# Altium PCB SLAVE_HW.PcbDoc (part 2 of 2)
Units mm, origin at the board's own origin, x right, y up, seen from the top; angles counter-clockwise.
Board outline 140 x 52 mm, 2 copper layers (Top Layer, Bottom Layer); 186 components, 129 nets, 475 pads, 0 vias.
Unrouted connection lines stored in the file: 330.
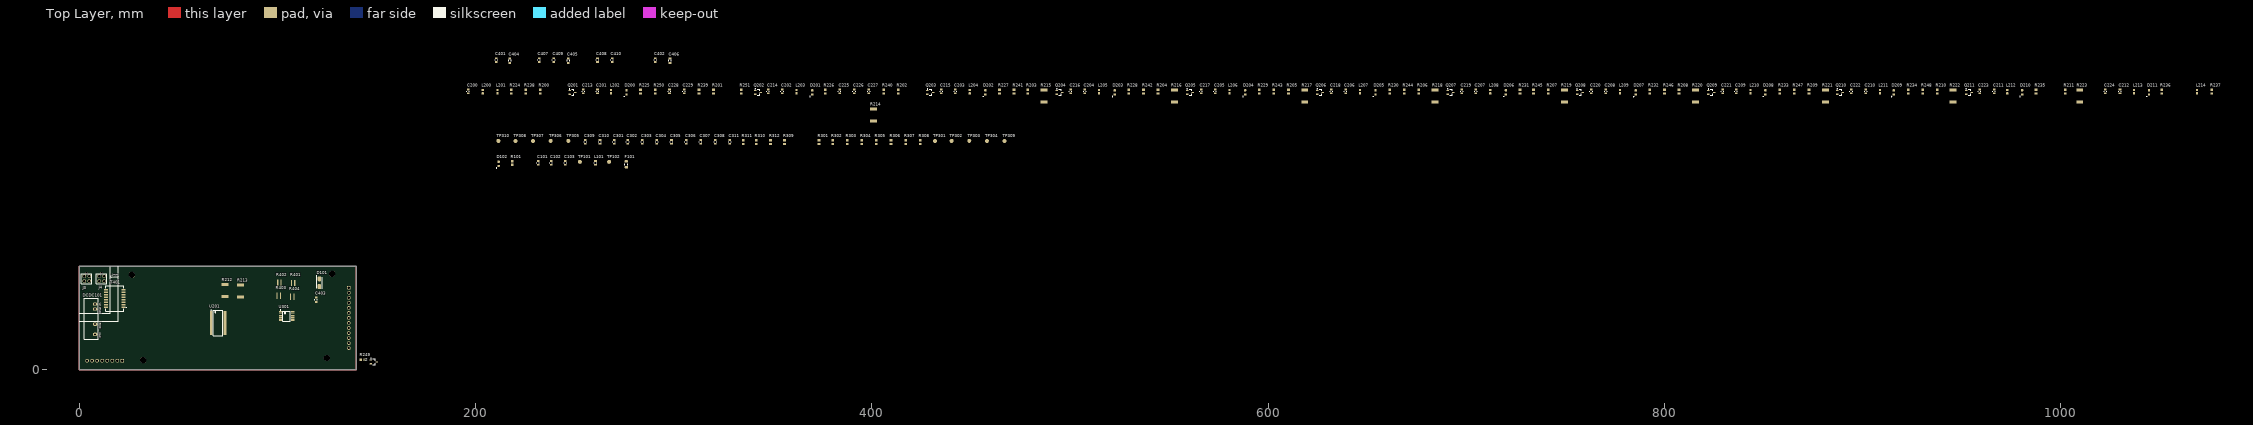
[diagram p0: Top Layer view]

## Part data (continued)
R301 R302 R303 R304 R305 R306 R307 R308 R309 R310 R311: library part R10k-0805FTK, "BOURNS         CR0805-JW-103ELF            Surface Mount Chip Resistor, Thick Film, CR Series, 10 kohm, 125 mW,  5%, 150 V", Case Code (Imperial)=0805, Case Code (Metric)=2012, Manufacturer 1=Bourns, Max Operating Temperature=155°C, Max Power Dissipation=125mW, Min Operating Temperature=-55°C, Package Quantity=1, Resistance=10kR, Resistance Tolerance=5%, Resistor Type="Thick Film", Temperature Coefficient=200ppm/°C, Voltage Rating=150V, Voltage Rating (DC)=100V, .Creator=DR, Case/Package=0805, Category="Chip SMD Resistors", ComponentLink1Description=https://datasheet.ciiva.com/11821/0900766b80fcdb72-11821135.pdf?src-supplier=RSComponents, ComponentLink1URL=https://datasheet.ciiva.com/11821/0900766b80fcdb72-11821135.pdf?src-supplier=RSComponents, ComponentLink2Description=https://datasheet.ciiva.com/9122/chpreztr-9122374.pdf?src-supplier=Avnet, ComponentLink2URL=https://datasheet.ciiva.com/9122/chpreztr-9122374.pdf?src-supplier=Avnet, ComponentLink3Description=https://datasheet.ciiva.com/22693/1902866-22693254.pdf?src-supplier=Element14, ComponentLink3URL=https://datasheet.ciiva.com/22693/1902866-22693254.pdf?src-supplier=Element14, ComponentLink4Description=https://datasheet.ciiva.com/7986/691949-7986187.pdf?src-supplier=Element14, ComponentLink4URL=https://datasheet.ciiva.com/7986/691949-7986187.pdf?src-supplier=Element14, ComponentLink5Description=https://datasheet.ciiva.com/30065/159chpreztr-30065976.pdf?src-supplier=Onlinecomponents.com, ComponentLink5URL=https://datasheet.ciiva.com/30065/159chpreztr-30065976.pdf?src-supplier=Onlinecomponents.com, ComponentLink6Description=https://datasheet.ciiva.com/16783/70154685-16783482.pdf?src-supplier=Allied+Electronics, ComponentLink6URL=https://datasheet.ciiva.com/16783/70154685-16783482.pdf?src-supplier=Allied+Electronics, ComponentLink7Description=https://datasheet.ciiva.com/5548/chpreztr-5548491.pdf?src-supplier=Mouser, ComponentLink7URL=https://datasheet.ciiva.com/5548/chpreztr-5548491.pdf?src-supplier=Mouser, ComponentLink8Description=https://datasheet.ciiva.com/6559/chpreztr-6559900.pdf?src-supplier=Digi-Key, ComponentLink8URL=https://datasheet.ciiva.com/6559/chpreztr-6559900.pdf?src-supplier=Digi-Key, ComponentLink9Description=https://datasheet.ciiva.com/6559/chpreztr-6559901.pdf?src-supplier=Digi-Key, ComponentLink9URL=https://datasheet.ciiva.com/6559/chpreztr-6559901.pdf?src-supplier=Digi-Key, ComponentLink10Description=https://datasheet.ciiva.com/7985/1856384-7985869.pdf?src-supplier=Element14, ComponentLink10URL=https://datasheet.ciiva.com/7985/1856384-7985869.pdf?src-supplier=Element14, ComponentLink11Description=https://datasheet.ciiva.com/48692/001055517-da-01-en-smd-wid-cr0805-jw-103elf-10k-ohm-1-8w-48692118.pdf?src-supplier=Conrad, ComponentLink11URL=https://datasheet.ciiva.com/48692/001055517-da-01-en-smd-wid-cr0805-jw-103elf-10k-ohm-1-8w-48692118.pdf?src-supplier=Conrad, Construction=Rectangular, Contact Plating=Tin, Depth=1.25mm, Features="Moisture Resistant", Height=0.5mm, Length=2mm, Manufacturer Part Number 1=CR0805-JW-103ELF, Military Standard=Not, Mount="Surface Mount", Number of Pins=2, Number of Terminations=2, Packaging="Tape and Reel", Power Rating=125mW, Pricing 1="1=0,05790, 10=0,01540, 25=0,01340, 100=0,00340 (USD)", Radiation Hardening=No, REACH SVHC="No SVHC", RoHS=Yes, RoHS Compliant=Yes, Series=CR0805, Stock 1=57566, Supplier 1="Arrow Electronics", Supplier Part Number 1=CR0805-JW-103ELF, Technology="THICK FILM", Termination=SMD/SMT, Thickness=508um, Tolerance=5%, Width=1.25mm
R401 R402 R403 R404: library part R47, "Res, 47R, 5%, 0.75W/Thick Film/0612 Wide Rohs Compliant: Yes", Manufacturer="Wurth Electronics", Manufacturer Part Number=561020132004, Supplier Part Number 1=4050711, Category="Chip SMD Resistors", ComponentLink1Description=http://katalog.we-online.de/pbs/datasheet/561020132004.pdf?src-supplier=Digi-Key, ComponentLink1URL=http://katalog.we-online.de/pbs/datasheet/561020132004.pdf?src-supplier=Digi-Key, Pricing 1="10=0,222, 100=0,15, 500=0,147, 1000=0,144, 2500=0,141, 5000=0,138, 25000=0,135, 50000=0,132 (EUR)", RoHS=No, Stock 1=4988, Supplier 1=Farnell
T401: library part TFMR_7490140117C
TP101 TP102 TP301 TP302 TP303 TP304 TP305 TP306 TP307 TP308 TP309 TP310: "Test Point 1x1 mm", .Creator=GP, .PCBcheck=GP, .SCHcheck=GP, Category=TestPoint
U201: library part U_LTC6811-1, "Sc-Automotive Multicell Battery Stack Monitor With Addressable Isospi Interface", Case/Package=SSOP, Manufacturer 1="Analog Devices", Supplier Part Number 1=505-LTC6811HG-1#PBF-ND, .Creator=GP, Category="Battery Management", ComponentLink1Description=Datasheet, ComponentLink1URL=https://www.analog.com/media/en/technical-documentation/data-sheets/ltc6811-1-6811-2.pdf, ComponentLink2Description="Where buy it", ComponentLink2URL=https://www.mouser.es/ProductDetail/Analog-Devices/LTC6811IG-23ZZTRPBF?qs=byeeYqUIh0NWJgxDt7RX5g%3D%3D, ComponentLink3Description=http://www.linear.com/docs/55980?src-supplier=Digi-Key, ComponentLink3URL=http://www.linear.com/docs/55980?src-supplier=Digi-Key, ComponentLink4Description=https://datasheet.octopart.com/LTC6811HG-1%23PBF-Analog-Devices-datasheet-138896417.pdf?src-supplier=Upverter, ComponentLink4URL=https://datasheet.octopart.com/LTC6811HG-1%23PBF-Analog-Devices-datasheet-138896417.pdf?src-supplier=Upverter, ComponentLink5Description=https://datasheet.octopart.com/LTC6811HG-1%23PBF-Linear-Technology-datasheet-66874450.pdf?src-supplier=Linear+Technology, ComponentLink5URL=https://datasheet.octopart.com/LTC6811HG-1%23PBF-Linear-Technology-datasheet-66874450.pdf?src-supplier=Linear+Technology, ComponentLink6Description=https://sigma.octopart.com/57702806/technical_drawing/Linear-Technology-LTC6811HG-1%23PBF.pdf?src-supplier=Linear+Technology, ComponentLink6URL=https://sigma.octopart.com/57702806/technical_drawing/Linear-Technology-LTC6811HG-1%23PBF.pdf?src-supplier=Linear+Technology, Manufacturer Part Number 1=LTC6811-1, Pricing 1="1=21,46000, 10=19,72200, 25=18,90400, 100=16,65600, 250=15,90600 (USD)", RoHS Compliant=Yes, Supplier 1=Digi-Key
U301: "CD4053B-Q1 Automotive Cmos Tripl", Case/Package=SOIC, Manufacturer="Texas Instruments", Manufacturer Part Number=CD4053BQM96G4Q1, Max Dual Supply Voltage=10V, Max Operating Temperature=125°C, Max Supply Voltage=20V, Min Dual Supply Voltage=2.5V, Min Operating Temperature=-40°C, Min Supply Voltage=5V, Operating Supply Current=80nA, Package Quantity=2500, Supplier Part Number 1=595-CD4053BQM96G4Q1, -3db Bandwidth=30MHz, Bandwidth=30MHz, Category="Interface ICs", ComponentLink1Description=https://datasheet.ciiva.com/1671/cd4053b-q1-1671196.pdf?src-supplier=Digi-Key, ComponentLink1URL=https://datasheet.ciiva.com/1671/cd4053b-q1-1671196.pdf?src-supplier=Digi-Key, ComponentLink2Description=https://datasheet.ciiva.com/1671/cd4053b-q1-1671195.pdf?src-supplier=Digi-Key, ComponentLink2URL=https://datasheet.ciiva.com/1671/cd4053b-q1-1671195.pdf?src-supplier=Digi-Key, ComponentLink3Description=https://datasheet.ciiva.com/1671/cd4053b-q1-1671197.pdf?src-supplier=Digi-Key, ComponentLink3URL=https://datasheet.ciiva.com/1671/cd4053b-q1-1671197.pdf?src-supplier=Digi-Key, ComponentLink4Description=https://datasheet.ciiva.com/14435/cd4053b-q1-14435722.pdf?src-supplier=Avnet, ComponentLink4URL=https://datasheet.ciiva.com/14435/cd4053b-q1-14435722.pdf?src-supplier=Avnet, Contact Plating=Gold, Lead Free="Lead Free", Mounting Technology="Surface Mount", Number of Bits=2, Number of Channels=3, Number of Circuits=3, Number of Inputs=6, Number of Outputs=3, Packaging="Tape and Reel", Pins=16, Pricing 1="1=0,75, 10=0,617, 50=0,617, 100=0,468, 1000=0,319, 10000=0,258 (USD)", Propagation Delay=20ns, RoHS=Yes, RoHS Compliant=Yes, Series="Automotive, AEC-Q100", Stock 1=7075, Supplier 1=Mouser, Weight=0.004998oz

## Free pads (board coordinates)
  round 3 hole 3.2 unplated: 1(32.385,4.699) 2(26.67,47.752) 3(124.968,5.842) 4(127.762,48.26)

## Nets (pads, with @x,y where several pads share a name; then routed paths per layer and width w, separated by ;. In a path a pad name is that pad's centre, name@x,y a point inside that pad or via, vN(x,y) a via of type N, cw(c..) or ccw(c..) an arc to the next point about the centre after c; other vN are vias at no path point)
+5: C101.2 D101.2 J3.2 J4.2 L101.1 TP101.1
C0: C201.1 R224.2 U201.26
C1: C201.2 C202.1 C213.2 R225.2 U201.24
C2: C202.2 C203.1 C214.2 R226.2 U201.22
C3: C203.2 C204.1 C215.2 R227.2 U201.20
C4: C204.2 C205.1 C216.2 R228.2 U201.18
C5: C205.2 C206.1 C217.2 R229.2 U201.16
C6: C206.2 C207.1 C218.2 R230.2 U201.14
C7: C207.2 C208.1 C219.2 R231.2 U201.12
C8: C208.2 C209.1 C220.2 R232.2 U201.10
C9: C209.2 C210.1 C221.2 R233.2 U201.8
C10: C210.2 C211.1 C222.2 R234.2 U201.6
C11: C211.2 C212.1 C223.2 R235.2 U201.4
C12: C212.2 C224.2 R236.2 U201.2
Cell0: J1.1 L200.2 L201.1
Cell1: J1.2 L202.1
Cell2: J1.3 L203.1
Cell3: J1.4 L204.1
Cell4: J1.5 L205.1
Cell5: J1.6 L206.1
Cell6: J1.7 L207.1
Cell7: J1.8 L208.1
Cell8: J1.9 L209.1
Cell9: J1.10 L210.1
Cell10: J1.11 L211.1
Cell11: J1.12 L212.1
Cell12: J1.13 L213.1 L214.1
Cells+: C228.1 C229.1 R237.2 U201.1
DTEN: C103.2 C225.2 C310.2 DCDC101.7 R101.1 R309.2 R310.2 R311.2 TP102.1 U201.36 U201.37 U201.40 U301.16
GND: C101.1 C102.1 C409.2 C410.2 D101.1 DCDC101.2 J3.3 J4.3
GPIO1: R312.2 U201.27
GPIO3: R309.1 U201.29 U301.11
GPIO4: R310.1 U201.32 U301.10
GPIO5: R311.1 U201.33 U301.9
IBIAS: R251.2 U201.45
ICMP: R250.2 R251.1 U201.46
IMA: C405.1 R403.1 T401.3 U201.41
IMA_OUT: J3.4 T401.14
IMB: C403.1 R401.1 T401.8 U201.47
IMB_OUT: J4.4 T401.9
IPA: C406.2 R404.2 T401.1 U201.42
IPA_OUT: J3.1 T401.16
IPB: C404.2 R402.2 T401.6 U201.48
IPB_OUT: J4.1 T401.11
NetC102_2: C102.2 F101.1 L101.2
NetC200_2: C200.2 R200.1
NetC309_1: C309.1 U301.6 U301.7 U301.8
NetC401_2: C401.2 C403.2 C404.1 R401.2 R402.1
NetC402_2: C402.2 C405.2 C406.1 R403.2 R404.1
NetC407_2: C407.2 T401.7
NetC408_2: C408.2 T401.2
NetC409_1: C409.1 T401.10
NetC410_1: C410.1 T401.15
NetD102_A: D102.A R101.2
NetD200_A: D200.A Q201.D R212.2
NetD200_K: D200.K R200.2
NetD201_A: D201.A Q202.D R213.2
NetD201_K: D201.K R201.2
NetD202_A: D202.A Q203.D R214.2
NetD202_K: D202.K R202.2
NetD203_A: D203.A Q204.D R215.2
NetD203_K: D203.K R203.2
NetD204_A: D204.A Q205.D R216.2
NetD204_K: D204.K R204.2
NetD205_A: D205.A Q206.D R217.2
NetD205_K: D205.K R205.2
NetD206_A: D206.A Q207.D R218.2
NetD206_K: D206.K R206.2
NetD207_A: D207.A Q208.D R219.2
NetD207_K: D207.K R207.2
NetD208_A: D208.A Q209.D R220.2
NetD208_K: D208.K R208.2
NetD209_A: D209.A Q210.D R221.2
NetD209_K: D209.K R209.2
NetD210_A: D210.A Q211.D R222.2
NetD210_K: D210.K R210.2
NetD211_A: 2.D D211.A R223.2
NetD211_K: D211.K R211.2
NetDCDC101_1: DCDC101.1 F101.2
NetL201_2: L201.2 R212.1 R224.1
NetL202_2: L202.2 Q201.S R201.1 R213.1 R225.1
NetL203_2: L203.2 Q202.S R202.1 R214.1 R226.1
NetL204_2: L204.2 Q203.S R203.1 R215.1 R227.1
NetL205_2: L205.2 Q204.S R204.1 R216.1 R228.1
NetL206_2: L206.2 Q205.S R205.1 R217.1 R229.1
NetL207_2: L207.2 Q206.S R206.1 R218.1 R230.1
NetL208_2: L208.2 Q207.S R207.1 R219.1 R231.1
NetL209_2: L209.2 Q208.S R208.1 R220.1 R232.1
NetL210_2: L210.2 Q209.S R209.1 R221.1 R233.1
NetL211_2: L211.2 Q210.S R210.1 R222.1 R234.1
NetL212_2: L212.2 Q211.S R211.1 R223.1 R235.1
NetL213_2: 2.S L213.2 R236.1
NetL214_2: L214.2 R237.1
NetQ201_G: Q201.G R238.1
NetQ202_G: Q202.G R239.1
NetQ203_G: Q203.G R240.1
NetQ204_G: Q204.G R241.1
NetQ205_G: Q205.G R242.1
NetQ206_G: Q206.G R243.1
NetQ207_G: Q207.G R244.1
NetQ208_G: Q208.G R245.1
NetQ209_G: Q209.G R246.1
NetQ210_G: Q210.G R247.1
NetQ211_G: Q211.G R248.1
NetQ212_G: 2.G R249.1
NetR312_1: R312.1 U301.3
NTC1: C301.2 J2.1 R301.1 TP301.1 U301.13
NTC2: C302.2 J2.2 R302.1 TP302.1 U301.14
NTC3: C303.2 J2.3 R303.1 TP303.1 U301.15
NTC4: C304.2 J2.4 R304.1 TP304.1 U301.12
NTC5: C305.2 J2.5 R305.1 TP305.1 U301.1
NTC6: C306.2 J2.6 R306.1 TP306.1 U301.5
NTC7: C307.2 J2.7 R307.1 TP307.1 U301.2
NTC8: C308.2 J2.8 R308.1 TP308.1 U301.4
S1: R238.2 U201.25
S2: R239.2 U201.23
S3: R240.2 U201.21
S4: R241.2 U201.19
S5: R242.2 U201.17
S6: R243.2 U201.15
S7: R244.2 U201.13
S8: R245.2 U201.11
S9: R246.2 U201.9
S10: R247.2 U201.7
S11: R248.2 U201.5
S12: R249.2 U201.3
V-: C103.1 C200.1 C213.1 C214.1 C215.1 C216.1 C217.1 C218.1 C219.1 C220.1 C221.1 C222.1 C223.1 C224.1 C225.1 C226.1 C227.1 C228.2 C229.2 C301.1 C302.1 C303.1 C304.1 C305.1 C306.1 C307.1 C308.1 C309.2 C310.1 C311.1 C401.1 C402.1 C407.1 C408.1 D102.K DCDC101.5 L200.1 R250.1 TP310.1 U201.30 U201.31
Vref1: C226.2 U201.35
Vref2: C227.2 R301.2 R302.2 R303.2 R304.2 R305.2 R306.2 R307.2 R308.2 TP309.1 U201.34
pads on no net: C311.2 J3.5 J4.5 T401.4 T401.5 T401.12 T401.13 U201.28 U201.38 U201.39 U201.43 U201.44
copper on no net: | length 384
  Top Layer w0.254: 0,0 140,0 140,52 0,52 0,0

## Other copper
Top Layer:

## Silkscreen, mask and mechanical layers (free items; w line width, h text height)
Top Overlay:
  lines w0.254: 0,24.448 19.84,24.448 19.872,52 ; 0,28.448 15.875,28.448 ; 15.872,28.448 15.872,51.873 ; 15.875,46.99 15.875,46.863 ; 15.938,46.863 16.002,46.863 ; 16.383,46.482 16.002,46.863 ; 16.383,47.244 16.002,46.863 ; 19.431,46.482 19.812,46.863 ; 19.431,47.244 19.812,46.863 ; 15.875,46.863 16.002,46.863 ; 15.875,46.863 19.812,46.863
  text "4mm" at 16.533,47.394 h1

## Text inside footprints (layer, text, board x,y; h text height)
DCDC101: Top Overlay "Vout" at 10.287,18.796 h0.76 r270; Top Overlay "GND" at 10.16,23.495 h0.76 r270; Top Overlay "GND" at 10.16,31.369 h0.76 r270; Top Overlay "Vin" at 10.287,33.655 h0.76 r270